# Altium PCB Sensors_TestBoard.PcbDoc
Units mil, origin at the board's own origin, x right, y up, seen from the top; angles counter-clockwise.
Board outline 3937.01 x 3937.01 mil, 2 copper layers (Top Layer, Bottom Layer); 30 components, 22 nets, 113 pads, 0 vias.
Unrouted connection lines stored in the file: 77.
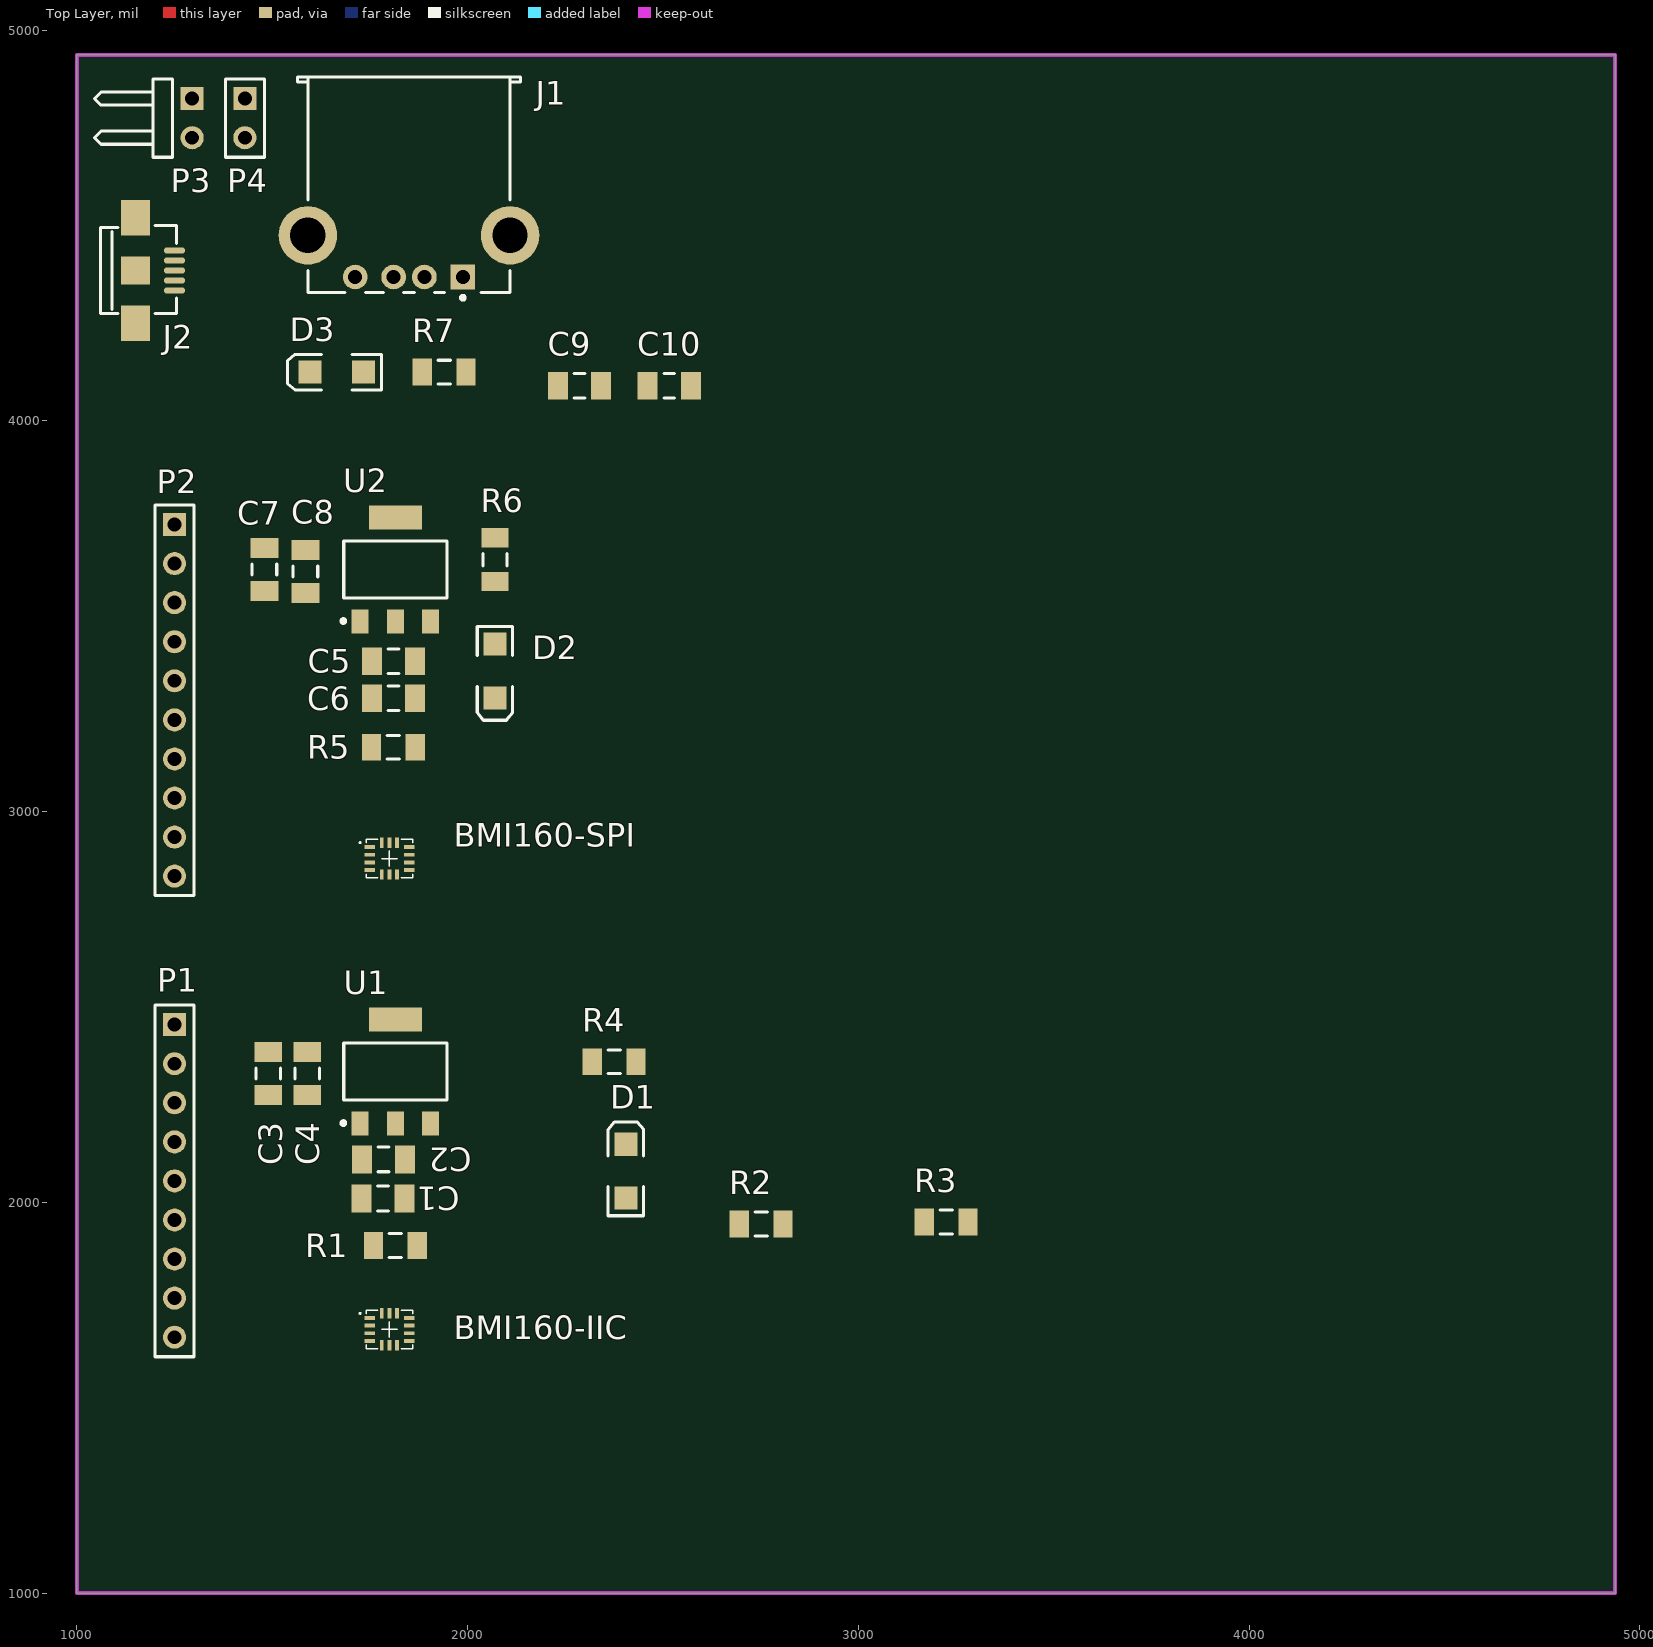
[diagram p0: Top Layer view]
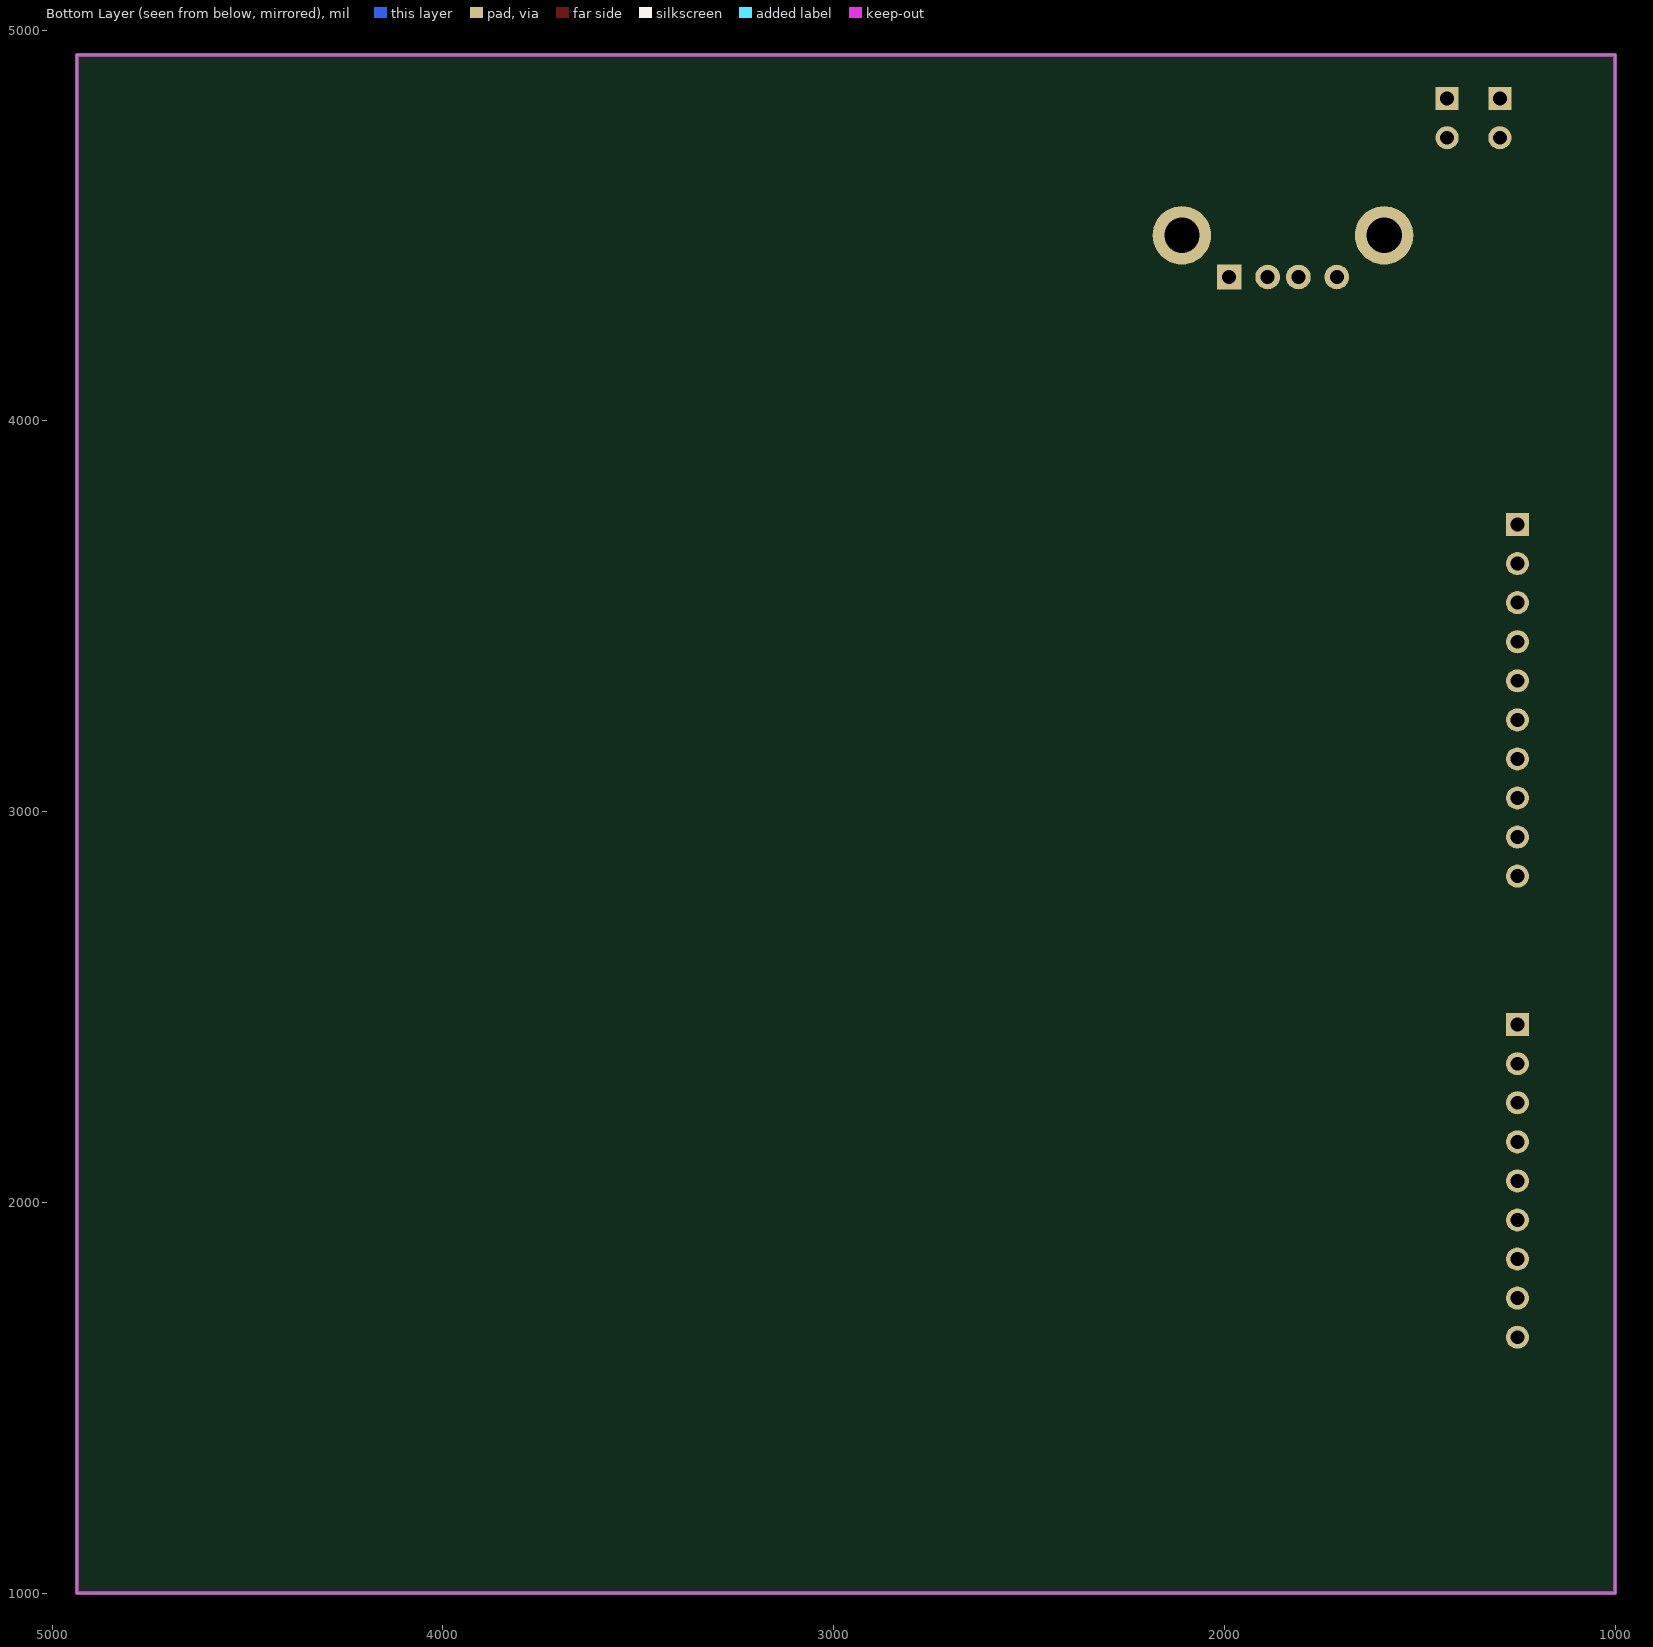
[diagram p1: Bottom Layer view, seen from below]

## Layer stack, top to bottom
Top Solder: solder mask 0.4, Solder Resist, Dk 3.5
Top Layer: signal copper 1.4
Dielectric 1: dielectric 12.6, FR-4, Dk 4.8
Bottom Layer: signal copper 1.4
Bottom Solder: solder mask 0.4, Solder Resist, Dk 3.5

## Board outline
1000,1000 1000,4937.01 4937.01,4937.01 4937.01,1000

## Design rules (kind name [scope] priority, off if disabled: settings)
Clearance [All] p1: gap=6
PolygonConnect [All] p1: connectstyle=Relief reliefconductorwidth=10 reliefentries=4 polygonreliefangle="90 Angle" airgapwidth=10
RoutingVias [All] p1: holewidth=28 width=50 viastyle="Through Hole" minholewidth=28 minwidth=50 maxholewidth=28 maxwidth=50
SolderMaskExpansion [All] p1: expansion=4
Width [All] p1: maxlimit=10 minlimit=10 preferedwidth=10
30 further rules are at their usual default settings.

## Components (designator, comment, footprint, x,y, rotation, side; value= is the part's Value field where it differs from the comment)
BMI160-IIC "BMI160" BMI160-LGA14 1800,1675 r0 top
BMI160-SPI "BMI160" BMI160-LGA14 1800,2880 r0 top
C1 "Cap" C1206 1783.9,2010 r180 top
C2 "Cap" C1206 1785,2110 r180 top
C3 "Cap" C1206 1490,2330 r270 top
C4 "Cap" C1206 1590,2330 r270 top
C5 "Cap" C1206 1810,3385 r180 top
C6 "Cap" C1206 1810,3290 r180 top
C7 "Cap" C1206 1480,3620 r270 top
C8 "Cap" C1206 1585,3615 r270 top
C9 "Cap" C1206 2286.1,4090 r0 top
C10 "Cap" C1206 2516.1,4090 r0 top
D1 "LED" 3.2X1.6X1.1 2405,2080 r90 top
D2 "LED" 3.2X1.6X1.1 2070,3360 r270 top
D3 "LED" 3.2X1.6X1.1 1665,4125 r180 top
J1 "USB" USB_A1 1850,4880 r90 top
J2 "USB_M" USB_MICRO 1150,4385 r270 top
P1 "BMI160-IIC" HDR1X9 1250,2455 r270 top
P2 "BMI160-SPI" HDR1X10 1250,3735 r270 top
P3 "Header 2H" HDR1X2H 1295,4825 r270 top
P4 "Header 2" HDR1X2 1430,4825 r270 top
R1 "Res" R1206 1815,1890 r180 top
R2 "Res" R1206 2751.1,1945 r0 top
R3 "Res" R1206 3225,1950 r0 top
R4 "Res" R1206 2375,2360 r0 top
R5 "Res" R1206 1810,3165 r180 top
R6 "Res" R1206 2070,3645 r270 top
R7 "Res" R1206 1940,4125 r180 top
U1 "AMS1117-3.3" AMS1117 1815,2335 r0 top
U2 "AMS1117-3.3" AMS1117 1815,3620 r0 top

## Footprints (in the part's own frame and the unit in brackets; to place one, negate y for a bottom-side part, rotate by r counter-clockwise, add the part's x,y. Pads: shape width x height; smd on the part's side, far side on the other; paste and mask are expansions set on the pad)
3.2X1.6X1.1 [mm] "SMT LED; 2 Flat Leads"
  rect 1.5x1.5 smd: 1(-1.75,0) 2(1.75,0)
  silkscreen extent -2.9,-1.15 3.2,1.15
AMS1117 [mm] "SOT-223"
  rect 1.1x1.55 smd: 1(-2.3,-3.375) 2(0,-3.375) 3(2.3,-3.375)
  rect 3.45x1.55 smd: 4(0,3.375)
  silkscreen extent -3.5,-3.48 3.35,1.85, body extent -3.3,-3.94 3.3,3.43, height 0.8
BMI160-LGA14 [mm] "LCC, 14-Pins, Body 2.50x3.00mmx0.83mm, Pitch 0.50mm, IPC Medium Density"
  rect 0.675x0.25 smd: 1(-1.287,0.75) 2(-1.287,0.25) 3(-1.287,-0.25) 4(-1.287,-0.75) 8(1.287,-0.75) 9(1.287,-0.25) 10(1.287,0.25) 11(1.287,0.75)
  rect 0.25x0.675 smd: 5(-0.5,-1.037) 6(0,-1.037) 7(0.5,-1.037) 12(0.5,1.037) 13(0,1.037) 14(-0.5,1.037)
  silkscreen extent -1.95,-1.25 1.5,1.25, body extent -1.5,-1.25 1.5,1.25, height 0.97
C1206 [mm] "Chip Capacitor, 2-Leads, Body 3.20x1.60mm, IPC Medium Density"
  rect 1.3x1.8 smd: 1(-1.4,0) 2(1.4,0)
  silkscreen extent -0.35,-0.8 0.35,0.8, body extent -1.7,-0.9 1.7,0.9, height 0.9
HDR1X2 [mm] "Connector; Header; 2 Position"
  rect 1.5x1.5 hole 0.9: 1(0,0)
  round 1.5 hole 0.9: 2(2.54,0)
  silkscreen extent -1.27,-1.27 3.81,1.27
HDR1X2H [mm] "Connector; Header; 2 Position; Right Angle"
  rect 1.5x1.5 hole 0.9: 1(0,0)
  round 1.5 hole 0.9: 2(2.54,0)
  silkscreen extent -1.27,-6.35 3.81,-1.27
HDR1X9 [mm] "Connector; Header; 9 Position"
  rect 1.5x1.5 hole 0.9: 1(0,0)
  round 1.5 hole 0.9: 2(2.54,0) 3(5.08,0) 4(7.62,0) 5(10.16,0) 6(12.7,0) 7(15.24,0) 8(17.78,0) 9(20.32,0)
  silkscreen extent -1.27,-1.27 21.59,1.27
HDR1X10 [mm] "Connector; Header; 10 Position"
  rect 1.5x1.5 hole 0.9: 1(0,0)
  round 1.5 hole 0.9: 2(2.54,0) 3(5.08,0) 4(7.62,0) 5(10.16,0) 6(12.7,0) 7(15.24,0) 8(17.78,0) 9(20.32,0) 10(22.86,0)
  silkscreen extent -1.27,-1.27 24.13,1.27
R1206 [mm] "Chip Resistor, 2-Leads, Body 3.20x1.60mm, IPC Medium Density"
  rect 1.25x1.75 smd: 1(-1.425,0) 2(1.425,0)
  silkscreen extent -0.4,-0.77 0.4,0.77, body extent -1.7,-0.87 1.7,0.87, height 0.65
USB_A1 [mm]
  rect 1.6x1.6 hole 0.92: 1(-12.99,-3.5)
  round 1.6 hole 0.92: 2(-12.99,-1) 3(-12.99,1) 4(-12.99,3.5)
  round 3.8 hole 2.3: 5(-10.28,6.57) 6(-10.28,-6.57)
  silkscreen extent -14.46,-7.25 0,7.25
USB_MICRO [mm] "USB方孔"
  oct 0.4x1.35 smd: 1(-1.3,2.54) 2(-0.65,2.54) 3(0,2.54) 4(0.65,2.54) 5(1.3,2.54)
  rect 2.286x1.9 smd: 6(3.429,0) 7(-3.429,0)
  rect 1.8x1.9 smd: 8(0,0)
  silkscreen extent -2.92,-2.29 2.79,2.67

## Part data
D1 D2 D3: library part LED2, "Typical RED, GREEN, YELLOW, AMBER GaAs LED"
J1: "USB接口"
J2: "MicroUSB接口"
P1: library part "Header 9", "Header, 9-Pin"
P2: library part "Header 10", "Header, 10-Pin"
P3: "Header, 2-Pin, Right Angle"
P4: "Header, 2-Pin"
U1 U2: library part AMS1117

## Nets (pads, with @x,y where several pads share a name; then routed paths per layer and width w, separated by ;. In a path a pad name is that pad's centre, name@x,y a point inside that pad or via, vN(x,y) a via of type N, cw(c..) or ccw(c..) an arc to the next point about the centre after c; other vN are vias at no path point)
BMI160-2-ASCX: BMI160-SPI.3 P2.9
BMI160-2-ASDX: BMI160-SPI.2 P2.8
BMI160-2-CSB: BMI160-SPI.12 P2.5
BMI160-2-GND: BMI160-IIC.6 BMI160-IIC.7 BMI160-SPI.6 BMI160-SPI.7 C1.2 C2.2 C3.2 C4.2 C5.2 C6.2 C7.2 C8.2 C9.2 C10.2 D1.2 D2.2 D3.2 J1.4 J2.5 P1.9 P2.10 P3.2 P4.2 R1.2 R5.2 U1.1 U2.1
BMI160-2-INT1: BMI160-SPI.4 P2.6
BMI160-2-INT2: BMI160-SPI.9 P2.7
BMI160-2-MISO: BMI160-SPI.1 P2.2 R5.1
BMI160-2-MOSI: BMI160-SPI.14 P2.3
BMI160-2-SCK: BMI160-SPI.13 P2.4
BMI160-2-VCC: BMI160-SPI.5 BMI160-SPI.8 C5.1 C6.1 C7.1 C8.1 P2.1 R6.1 U2.2 U2.4
BMI160-ASCX: BMI160-IIC.3 P1.8
BMI160-ASDX: BMI160-IIC.2 P1.7
BMI160-INT1: BMI160-IIC.4 P1.5
BMI160-INT2: BMI160-IIC.9 P1.6
BMI160-SCL: BMI160-IIC.13 P1.3 R2.1
BMI160-SDA: BMI160-IIC.14 P1.2 R3.1
BMI160-SDO: BMI160-IIC.1 P1.4 R1.1
BMI160-VCC: BMI160-IIC.5 BMI160-IIC.8 BMI160-IIC.12 C1.1 C2.1 C3.1 C4.1 P1.1 R2.2 R3.2 R4.1 U1.2 U1.4
MODS-VCC: C9.1 C10.1 J1.1 J2.1 P3.1 P4.1 R7.1 U1.3 U2.3
NetD1_1: D1.1 R4.2
NetD2_1: D2.1 R6.2
NetD3_1: D3.1 R7.2
pads on no net: BMI160-IIC.10 BMI160-IIC.11 BMI160-SPI.10 BMI160-SPI.11 J1.2 J1.3 J1.5 J1.6 J2.2 J2.3 J2.4 J2.6 J2.7 J2.8

## Keep-outs
Keep-Out Layer:
  the board outline again, w10